# Altium PCB uku20710_proc.PcbDoc (part 2 of 3)
Units mm, origin at the board's own origin, x right, y up, seen from the top; angles counter-clockwise.
Board outline 354.7 x 156.7 mm, 4 copper layers (Top Layer, MidLayer1, MidLayer2, Bottom Layer); 286 components, 533 nets, 991 pads, 570 vias.
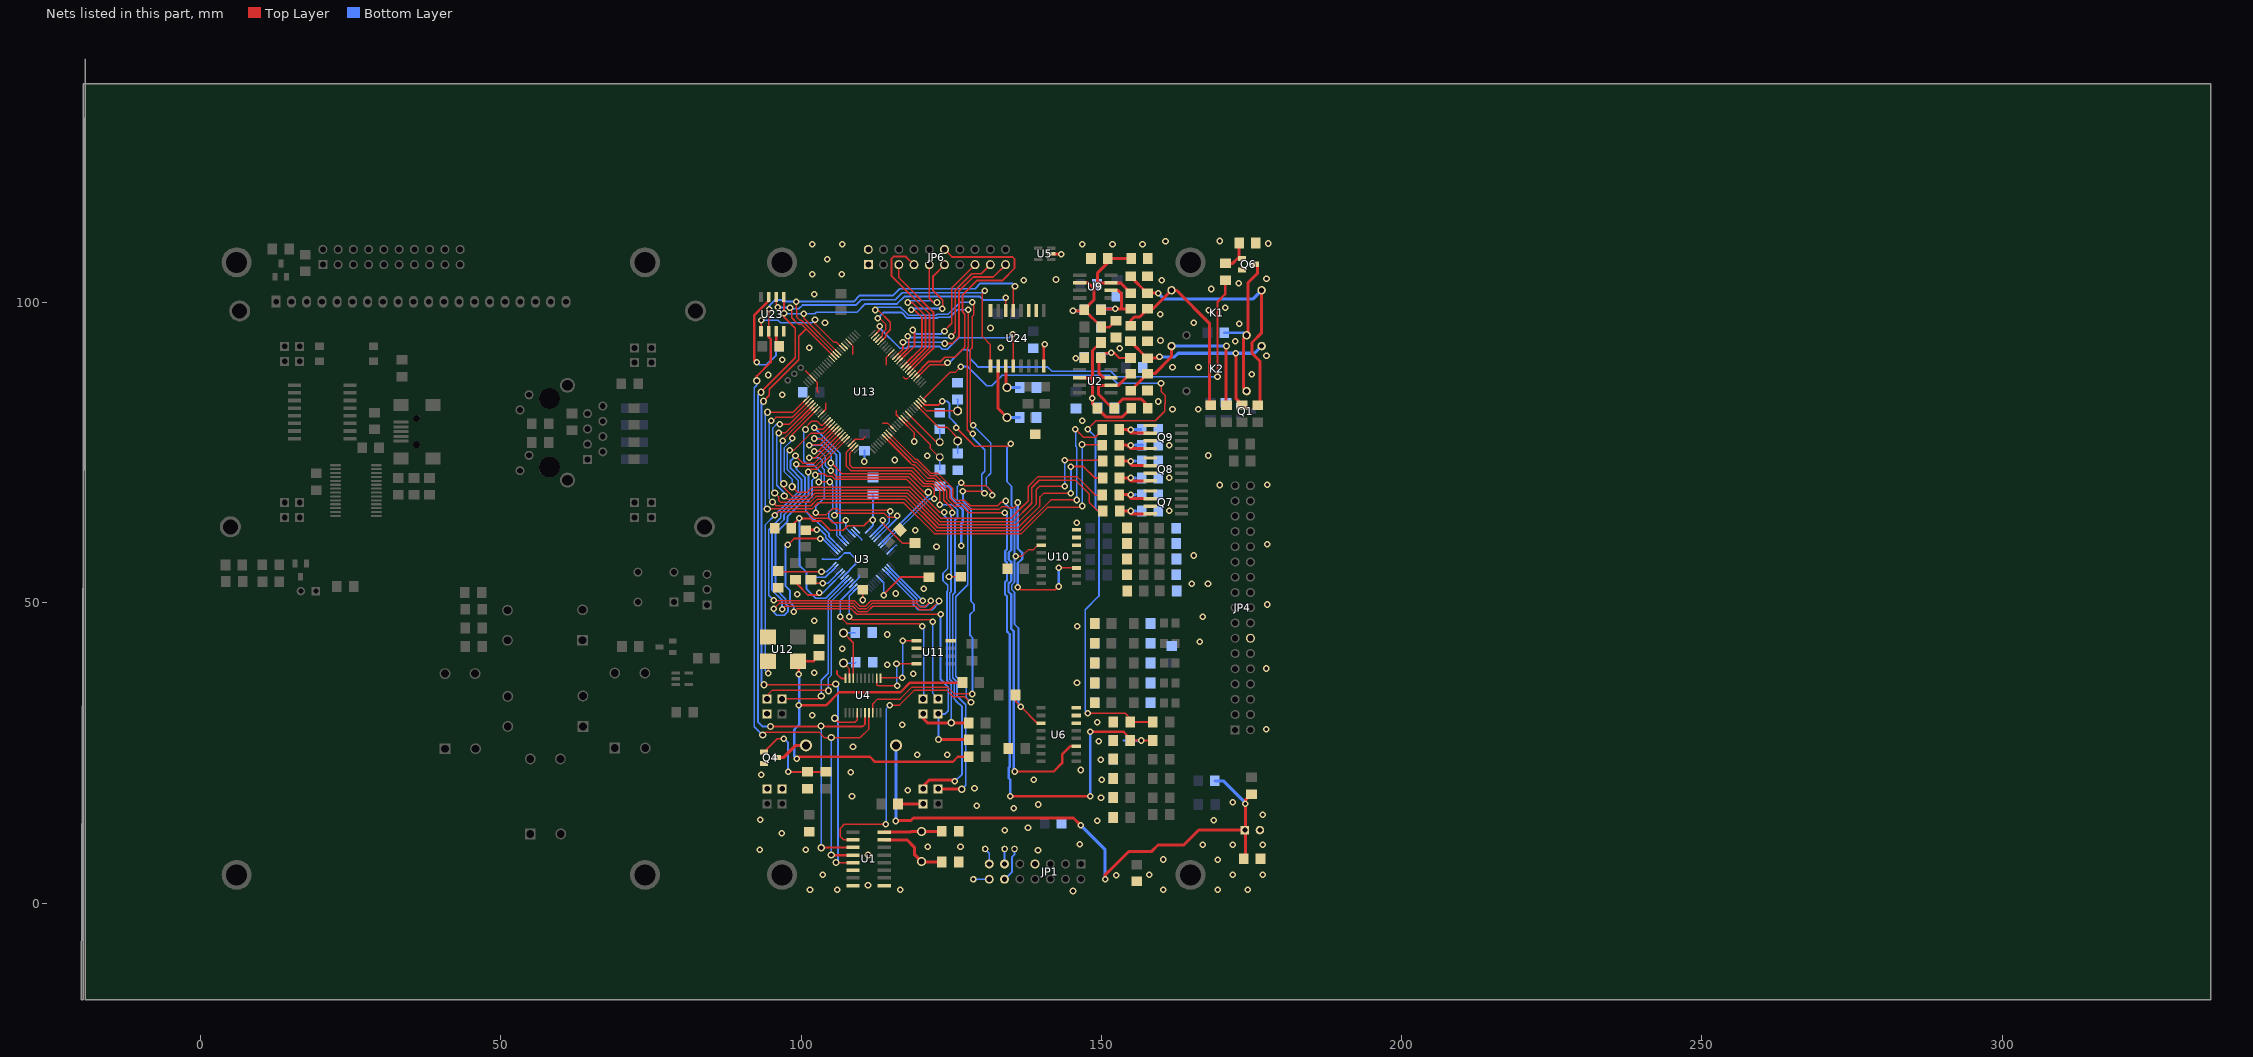
[diagram p2: the nets of this part, all layers, seen from the top]

## Via types
v1: diameter 1.1, hole 0.6, Top Layer to Bottom Layer, 491 vias
v2: diameter 1.2, hole 0.7, Top Layer to Bottom Layer, 63 vias
v3: diameter 1.5, hole 1, Top Layer to Bottom Layer, 12 vias
v4: diameter 1.27, hole 0.7, Top Layer to Bottom Layer, 3 vias
v5: diameter 1.2, hole 0.6, Top Layer to Bottom Layer, 1 vias

## Nets (pads, with @x,y where several pads share a name; then routed paths per layer and width w, separated by ;. In a path a pad name is that pad's centre, name@x,y a point inside that pad or via, vN(x,y) a via of type N, cw(c..) or ccw(c..) an arc to the next point about the centre after c; other vN are vias at no path point) (continued)
GND: C1.2 C2.1 C3.2 C4.2 C5.2 C6.2 C7.2 C8.2 C9.2 C10.2 C12.1 C13.2 C14.1 C15.1 C16.1 C17.1 C18.1 C19.1 C20.1 C21.2 C22.1 C23.2 C24.2 C25.1 C26.2 C28.2 C30.2 C31.2 C32.2 C33.2 C34.2 C35.1 C36.1 C37.2 C38.2 C39.2 C40.2 C50.1 C51.1 C52.1 C53.1 C54.1 C55.1 C56.1 C57.1 C58.1 C60.1 C62.1 C63.1 C64.1 C65.1 C66.2 C200.1 C201.1 D3.1 D4.1 D6.1 D7.1 D8.1 D9.1 D10.1 D11.1 D12.1 D13.1 JP1.7 JP4.14 JP6.1 JP6.2 Q1.2 Q4.2 Q6.2 Q7.1 Q7.3 Q8.1 Q8.3 Q9.1 Q9.3 R1.1 R18.2 R19.1 R23.1 R24.2 R26.2 R28.2 R32.2 R34.1 R35.2 R39.1 R40.2 R48.1 R55.1 R59.1 R69.1 R70.1 R74.1 R76.1 R77.1 R78.1 R81.1 R82.1 R117.1 R127.1 U1.6 U1.8 U1.9 U3.15 U3.19 U3.35 U3.36 U3.47 U4.10 U5.2 U6.6 U6.7 U6.8 U10.6 U10.7 U10.8 U11.2 U11.8 U12.2 U13.11 U13.15 U13.31 U13.41 U13.55 U13.72 U13.83 U13.97 U23.4 U24.8 U24.10 U24.11 U24.16 X5.1 X9.1 X11.1 | length 62.9
  Top Layer w0.25: 100.724,88.638 U13.72@101.912,87.449 102.649,86.713 102.649,85.251 102.849,85.051 ; U13.83@103.327,81.439 104.099,82.211 104.099,83.251 ; U13.55@107.923,93.46 108.55,92.832 108.55,91.373 ; U13.97@108.276,76.489 109.007,77.219 110.25,77.219 110.624,77.593 110.624,77.62 ; C30.2@110.246,52.149 110.279,52.116 v1@110.279,50.449 ; 113.624,79.92 114.391,79.92 U13.11@115.347,78.964 ; 114.201,89.623 114.201,90.9 U13.41@114.994,91.692 ; 115.824,81.971 115.824,81.316 116.616,80.523 U13.15@116.762,80.378 118.853,78.287 118.853,77.519 ; 117.024,87.573 117.324,87.273 117.646,87.273 U13.31@118.529,88.156
  Top Layer w0.3: 105.972,38.66 105.972,38.11 106.671,37.41 U4.10@107.377,37.41
  Top Layer w0.4: C30.2@110.227,51.548 110.246,51.566 C30.2@110.246,52.149 ; 140.308,92.523 140.358,92.523 140.419,92.462 U24.8@140.419,89.426 U24.8@140.419,89.373
  Top Layer w0.5: U24.10@139.149,98.676 U24.10@139.174,98.701 ; U5.2@141.399,108.101 U5.2@141.633,108.101 v1@142.824,108.101
  Bottom Layer w0.25: 103.628,57.216 106.193,57.216 ; U3.19@107.085,54.448 U3.19@107.142,54.506 ; U3.15@108.499,53.034 109.677,54.213 109.677,54.549 ; U3.35@108.852,61.767 110.102,60.518 110.102,60.451 ; U3.47@114.757,58.585 115.772,59.6 115.879,59.6
  Bottom Layer w0.3: 103.576,57.286 103.612,57.25 ; 106.176,57.25 107.213,58.286 108.115,58.286 109.027,57.375 109.027,56.391 U3.19@107.142,54.506 ; v1@110.557,73.575 C32.2@110.557,75.332
  Bottom Layer w0.4: C35.1@123.118,69.389 124.7,69.389 124.971,69.117 124.971,67.427 126.882,65.517 126.882,63.416 126.682,63.216 v1(126.682,59.465)
  other v1: 145.271,2.001 101.472,2.201 106.027,2.201 116.529,2.201 160.29,2.201 169.371,2.201 174.344,2.201 111.128,2.951 152.438,4.651 103.572,4.701 157.971,4.701 171.843,4.701 176.845,4.701 169.343,7.202 160.271,7.252 111.128,8.002 139.435,8.802 93.123,8.902 100.775,8.902 121.071,9.402 126.532,9.402 166.842,9.702 171.843,9.702 176.871,9.702 146.371,9.802 96.774,11.651 133.871,12.103 137.771,12.503 149.338,13.703 168.692,13.751 93.173,13.851 176.845,14.704 135.434,15.751 129.271,16.204 139.471,16.404 171.843,16.804 149.938,17.504 108.472,17.804 117.771,18.805 128.871,19.105 150.038,20.505 138.735,20.551 93.374,21.351 108.272,21.755 146.587,22.151 149.888,23.851 119.33,24.706 124.331,24.706 108.627,26.051 149.588,26.951 177.471,28.957 116.829,29.707 149.338,30.108 101.826,31.251 145.937,36.651 118.68,38.21 102.172,38.36 177.445,39.051 114.329,39.71 106.827,42.351 166.392,43.511 114.329,44.711 145.971,46.112 102.172,47.012 166.842,47.662 177.595,49.713 110.252,50.464 99.325,51.451 115.729,51.551 120.43,52.313 165.042,53.151 167.742,53.151 165.392,57.865 122.531,59.315 177.595,59.715 118.98,62.051 145.887,63.316 161.271,65.316 169.693,69.618 177.595,69.651 161.271,70.818 110.502,73.52 115.571,73.769 120.971,74.469 167.771,74.519 161.271,76.219 118.83,76.851 146.837,80.32 161.841,82.221 166.142,82.221 159.49,83.521 96.824,84.651 94.524,87.922 175.044,88.051 161.841,89.222 166.171,89.222 96.824,90.451 145.737,90.751 177.495,91.151 153.039,92.373 101.326,92.451 133.234,92.451 140.585,93.051 172.293,93.524 159.84,93.674 131.533,95.751 172.944,96.451 103.972,96.624 165.371,96.624 159.771,98.075 167.842,98.725 170.643,99.125 102.172,101.376 168.292,102.251 172.844,103.176 137.035,103.676 160.071,103.726 142.436,103.826 177.495,103.976 101.876,104.726 106.772,104.726 104.326,107.227 143.336,108.051 106.827,109.678 146.837,109.678 151.838,109.678 101.826,109.728 156.84,109.728 177.771,109.828 160.671,110.228 169.693,110.251
GND_P: 
NetA1_1: A1.1 Q4.3 | length 5.6
  Top Layer w0.5: Q4.3@96.022,24.205 97.023,24.205 99.025,26.207 A1.1@100.775,26.207
NetA1_2: A1.2 C3.1 R16.1 R19.2 R103.1 | length 99.8
  Top Layer w0.5: v1@115.779,13.753 118.28,13.753 118.68,14.154 145.337,14.154 v1(146.537,12.953) ; v1(150.638,3.951) 150.638,4.701 151.238,5.301 ; 151.25,5.29 154.511,8.551 158.313,8.551 159.414,9.652 163.714,9.652 166.213,12.151 173.886,12.151 C3.1@173.974,12.151 ; R19.2@173.674,7.401 173.974,7.701 173.974,12.143 C3.1@173.974,12.151 ; R16.1@174.981,18.139 173.974,17.132 C3.1@173.974,12.151
  Bottom Layer w0.5: v1@115.779,13.753 115.797,13.772 A1.2@115.797,26.245 ; v1(146.537,12.953) 150.638,8.852 v1(150.638,3.951) ; R103.1@168.905,20.349 170.299,20.349 173.944,16.704 v1(173.944,16.554)
  other v1: 115.779,13.653
NetBT2_1: 
NetBT2_2: 
NetBT700_1: 
NetC2_1: 
NetC2_2: C2.2 U4.8 Y5.2 | length 10.2
  Top Layer w0.25: Y5.2@107.051,44.969 108.677,43.343 U4.8@108.677,37.41
  Bottom Layer w0.25: Y5.2@107.051,44.969 108.958,44.969 C2.2@109.001,45.012
NetC11_1: C11.1 C15.2 R57.2 R62.1 U9.6 | length 16.8
  Top Layer w0.4: R62.1@149.987,95.908 150.018,95.908 150.031,95.908 151.345,95.908 C15.2@152.362,96.925
  Top Layer w0.5: 145.874,98.651 145.874,98.626 145.874,98.601 146.93,98.601 R57.2@147.062,98.733 ; U9.6@146.374,103.301 146.385,103.301 147.774,103.301 148.774,102.301 148.774,100.445 R57.2@147.137,98.808 R57.2@147.062,98.733 ; R62.1@150.124,96.001 150.031,95.908 150.024,95.901 150.018,95.908 150.002,95.923 147.192,98.733 147.137,98.733 R57.2@147.062,98.733 ; R62.1@150.468,95.908 R62.1@150.487,95.908
  Bottom Layer w0.5: 145.874,98.601 147.074,98.601 C11.1@147.174,98.701
  other v1: 145.261,98.626
NetC11_2: C11.2 R57.1 R61.2 U9.2 | length 11
  Top Layer w0.5: R57.1@150.47,98.641 150.78,98.951 v1(152.274,98.951) 153.374,98.951 ; U9.2@151.585,102.019 152.807,102.019 153.374,101.451 153.374,98.951 ; R61.2@154.881,98.939 154.874,98.951 153.374,98.951
  Bottom Layer w0.6: C11.2@150.477,98.648 150.78,98.951 v1(152.274,98.951) v1@152.324,98.951
NetC12_2: C12.2 K1.3 R60.1 R61.1 | length 32
  Top Layer w0.5: R61.1@154.881,96.139 154.881,97.008 155.474,97.601 156.374,97.601 157.699,98.926 157.774,99.001 158.64,99.001 K1.3@161.68,102.041 162.485,102.041 167.968,96.558 R60.1@167.968,82.864
NetC14_2: C14.2 K1.1 R64.1 R65.1 | length 44.4
  Top Layer w0.5: R65.1@154.874,104.351 154.874,104.301 157.574,101.601 157.678,101.601 159.424,101.601 v1(159.474,101.551) ; R64.1@176.374,82.851 176.374,90.251 175.074,91.551 175.074,93.351 176.68,94.957 K1.1@176.68,102.041
  Bottom Layer w0.5: v1(159.474,101.551) 160.474,100.551 175.19,100.551 K1.1@176.68,102.041
NetC21_1: C21.1 C34.1 U3.18 U3.23 U3.37 | length 48.4
  Top Layer w0.3: C21.1@98.376,62.352 C21.1@98.375,62.402 98.376,62.802 v1(99.676,64.103) ; v1@99.702,63.687 99.897,63.882 100.052,64.037 101.487,64.037 101.891,63.632 103.306,63.632 104.852,62.087 107.002,62.087 107.752,62.837 110.452,62.837 111.402,63.787 v1(111.952,63.787)
  Bottom Layer w0.3: v1@99.702,63.687 99.702,56.237 100.902,55.037 100.902,54.237 ; U3.23@105.67,55.863 104.044,54.237 100.902,54.237 ; U3.18@107.438,54.095 104.08,50.737 102.402,50.737 100.902,52.237 100.902,54.237 ; U3.37@111.221,62.12 111.952,62.851 v1(111.952,63.787) 111.952,67.987 C34.1@111.902,68.037
NetC22_1: 
NetC22_2: C22.2 U4.9 Y5.1 | length 5.1
  Top Layer w0.25: Y5.1@107.051,39.969 108.027,38.993 U4.9@108.027,37.41
  Bottom Layer w0.25: Y5.1@107.051,39.969 108.979,39.969 C22.2@109.114,40.105
NetC23_1: C23.1 R65.2 R69.2 U9.3 | length 14.7
  Top Layer w0.5: R65.2@154.874,101.551 154.874,101.601 153.187,103.289 U9.3@151.585,103.289 149.587,103.289 149.374,103.501 149.374,104.951 151.059,106.636 C23.1@151.059,107.325 151.083,107.301 154.874,107.301 R69.2@154.937,107.308
NetC33_1: C33.1 R98.1 R99.1 U12.4 | length 78.8
  Top Layer w0.4: v1(99.275,24.006) 99.619,24.35 111.435,24.35 112.278,23.506 125.238,23.506 126.082,24.35 R99.1@127.92,24.35 ; v1(99.625,32.908) 104.126,32.908 106.327,35.109 116.529,35.109 118.123,36.703 R98.1@126.87,36.703 ; v1(99.625,38.11) 99.625,40.26 102.076,40.26 C33.1@102.976,41.16
  Bottom Layer w0.4: v1(99.275,24.006) 98.825,24.456 98.825,28.857 99.675,29.707 99.675,38.06 v1(99.625,38.11)
NetC35_2: C35.2 U13.16 Y1.2 | length 11.1
  Top Layer w0.25: U13.16@117.115,80.732 121.524,76.322 121.524,75.701 122.976,74.25 123.074,74.25 Y1.2@123.079,74.25
  Bottom Layer w0.3: Y1.2@123.079,74.25 123.079,74.248 123.079,72.228 C35.2@123.118,72.189 C35.2@123.124,72.195
NetC36_2: C36.2 U13.18 Y1.1 | length 9.3
  Top Layer w0.25: U13.18@117.822,81.439 122.511,76.75 123.074,76.75 Y1.1@123.079,76.75
  Bottom Layer w0.3: Y1.1@123.079,76.75 123.079,78.862 C36.2@123.081,78.864
NetC45_1: 
NetC45_2: 
NetC46_1: 
NetC46_2: 
NetC47_2: 
NetC48_1: 
NetC48_2: 
NetC49_1: 
NetC50_2: C50.2 U24.2 Y4.1 | length 11.3
  Top Layer w0.5: U24.2@132.799,89.426 132.799,82.334 Y4.1@134.274,80.859
  Bottom Layer w0.5: Y4.1@134.274,80.859 136.367,80.859 C50.2@136.387,80.845
NetC51_2: C51.2 U13.23 Y3.1 | length 8.9
  Top Layer w0.25: U13.23@119.59,83.207 120.853,81.943 Y3.1@126.075,81.943
  Bottom Layer w0.3: C51.2@126.021,83.848 126.075,83.795 Y3.1@126.075,81.943
NetC52_2: C52.2 U13.22 Y3.2 | length 11.6
  Top Layer w0.25: U13.22@119.236,82.853 122.838,79.251 124.274,79.251 126.075,77.451 Y3.2@126.075,76.943
  Bottom Layer w0.3: C52.2@126.075,74.901 Y3.2@126.075,76.943
NetC53_2: C53.2 U24.3 Y4.2 | length 5.8
  Top Layer w0.5: U24.3@134.069,89.426 134.069,86.064 Y4.2@134.274,85.859
  Bottom Layer w0.5: Y4.2@134.274,85.859 136.372,85.859 C53.2@136.387,85.845
NetC61_1: C61.1 C64.2 R12.2 R122.1 U2.6 | length 22.8
  Top Layer w0.5: U2.6@146.374,87.451 148.474,87.451 ; C61.1@149.224,82.451 148.474,83.201 v1(148.474,84.051) 148.474,87.451 ; C61.1@149.324,82.401 150.824,80.901 153.43,80.901 R12.2@154.937,82.408 ; R122.1@149.874,93.351 148.524,92.001 148.524,89.651 148.474,89.601 148.474,87.451
  Bottom Layer w0.5: v1(148.474,84.051) 148.474,83.201 149.224,82.451 149.372,82.451 C64.2@149.374,82.451
NetC61_2: C61.2 R12.1 R121.2 U2.2 | length 18.3
  Top Layer w0.5: R121.2@154.881,88.139 154.762,88.139 152.839,86.216 U2.2@151.574,86.216 149.739,86.216 149.474,85.951 149.474,84.751 151.774,82.451 152.024,82.451 152.074,82.401 152.074,82.404 152.074,82.451 152.077,82.454 153.524,83.901 156.674,83.901 157.674,82.901 157.674,82.408 R12.1@157.674,82.401
NetC62_2: C62.2 K2.3 R13.1 R121.1 | length 30
  Top Layer w0.5: R121.1@154.881,85.339 154.874,85.401 154.881,85.401 154.924,85.401 157.674,88.151 158.874,88.151 161.68,90.957 K2.3@161.68,92.741 ; R13.1@170.768,82.864 170.768,92.695 v1(170.824,92.751)
  Bottom Layer w0.5: K2.3@161.68,92.741 170.814,92.741 v1(170.824,92.751)
NetC63_2: C63.2 K2.1 R124.1 R125.1 | length 33
  Top Layer w0.5: R125.1@154.868,93.564 154.874,93.551 154.874,93.451 157.574,90.751 157.678,90.751 159.474,90.751 v1(159.674,90.951) ; v1(172.374,91.551) 172.374,84.057 R124.1@173.568,82.864
  Bottom Layer w0.5: v1(159.674,90.951) 162.174,90.951 162.774,91.551 v1(172.374,91.551) 175.49,91.551 K2.1@176.68,92.741
NetC66_1: C66.1 R125.2 R127.2 U2.3 | length 12.8
  Top Layer w0.4: R127.2@149.912,90.795 150.642,91.524 151.662,91.524 152.212,91.524 152.973,90.764 R125.2@154.868,90.764
  Top Layer w0.5: R127.2@150.474,90.851 150.474,90.801 150.19,90.517 149.574,89.901 149.574,88.201 150.289,87.486 U2.3@151.574,87.486
  Bottom Layer w0.5: C66.1@149.972,90.854 150.641,91.524 v1@151.612,91.524
  other v1: 151.662,91.624
NetC200_2: C200.2 U1.16 Y2.2 | length 9.7
  Top Layer w0.5: U1.16@113.803,11.804 118.154,11.804 118.26,11.911 Y2.2@120.054,11.911 123.368,11.911 C200.2@123.418,11.961
NetC201_2: C201.2 U1.15 Y2.1 | length 11.8
  Top Layer w0.5: U1.15@113.852,10.528 117.629,10.528 118.854,9.303 118.854,8.111 120.162,6.803 C201.2@123.405,6.803
NetC302_1: 
NetC302_2: 
NetC500_2: 
NetC502_1: 
NetC502_2: 
NetC505_1: 
NetC505_2: 
NetC508_1: 
NetC510_1: 
NetC511_1: 
NetC511_2: 
NetC512_2: 
NetC513_2: 
NetC514_1: 
NetC516_1: 
NetC516_2: 
NetC517_1: 
NetC600_1: 
NetC600_2: 
NetC700_1: 
NetC700_2: 
NetC701_1: 
NetC702_1: 
NetC704_2: 
NetC705_2: 
NetC706_1: 
NetC707_1: 
NetC707_2: 
NetC709_1: 
NetC709_2: 
NetC710_1: 
NetC713_1: 
NetC714_1: 
NetC715_1: 
NetD1_2: D1.2 X18.1 | length 4.3
  Top Layer w0.5: D1.2@116.079,16.554 116.092,16.554 116.145,16.501 X18.1@120.322,16.501
NetD3_1: 
NetD3_2: 
NetD5_1: D5.1 K1.5 K2.5 Q6.3 | length 26.3
  Top Layer w0.5: K2.5@174.18,85.241 173.674,85.746 173.674,94.035 K1.5@174.18,94.541 174.374,94.735 174.374,103.251 176.024,104.901 176.024,106.122 Q6.3@175.768,106.378
  Bottom Layer w0.4: D5.1@170.474,94.951 173.77,94.951 K1.5@174.18,94.541
NetD20_2: 
NetD500_1: 
NetD500_2: 
NetD501_1: 
NetD503_1: 
NetD505_1: 
NetD505_2: 
NetD506_1: 
NetD700_1: 
NetD701_1: 
NetD702_1: 
NetD703_2: 
NetD704_1: 
NetD705_1: 
NetD706_1: 
NetDS1_1: 
NetDS1_2: 
NetFU500_1: 
NetFU700_1: 
NetFU700_2: 
NetJ1_2: 
NetJ1_3: 
NetJ1_4: 
NetJ1_7: 
NetJ301_1: 
NetJ301_2: 
NetJ301_3: 
NetJ301_6: 
NetJ301_10: 
NetJ301_11: 
NetJ600_1: 
NetJP1_9: 
NetJP1_10: 
NetJP2_1: 
NetJP2_2: 
NetJP3_3: 
NetJP3_3: 
NetJP5_5: 
NetJP5_6: 
NetJP5_7: 
NetJP5_9: 
NetJP5_10: 
NetJP5_11: 
NetJP5_12: 
NetJP9_1: 
NetJP10_1: 
NetJP10_2: 
NetJP10_3: 
NetJP10_4: 
NetJP10_5: 
NetJP10_6: 
NetQ1_1: Q1.1 R1.2 R84.2 | length 5
  Bottom Layer w0.3: R84.2@168.113,80.469 172.365,80.469 Q1.1@172.868,80.971
NetQ1_1: 
NetQ1_2: 
NetQ4_1: Q4.1 R22.2 R23.2 | length 16.4
  Top Layer w0.3: Q4.1@93.774,25.106 96.024,27.357 v1(97.124,27.357) ; v1(97.825,21.856) 97.825,21.805 97.862,21.843 R22.2@104.133,21.843
  Bottom Layer w0.3: v1(97.124,27.357) 97.825,26.657 v1(97.825,21.856)
NetQ5_2: 
NetQ6_1: Q6.1 R72.2 R74.2 | length 5.4
  Top Layer w0.5: R72.2@170.667,106.528 171.867,106.528 172.666,107.326 Q6.1@173.422,107.326 ; Q6.1@172.924,107.585 172.924,109.885 R74.2@172.924,109.929
NetQ7_2: Q7.2 R31.2 R34.2 | length 6.2
  Top Layer w0.5: R31.2@153.012,67.995 153.019,68.001 154.324,68.001 154.499,67.826 154.549,67.776 154.599,67.726 154.984,67.341 Q7.2@158.136,67.341
  Bottom Layer w0.5: v1@154.874,67.951 155.624,67.951 155.637,67.995
  other v1: 154.874,68.001
NetQ7_4: Q7.4 R38.2 R39.2 | length 6.1
  Top Layer w0.5: R38.2@153.024,65.301 154.324,65.301 154.513,65.112 154.563,65.062 154.613,65.012 154.824,64.801 154.874,64.801 Q7.4@158.136,64.801
  Bottom Layer w0.5: v1(154.874,65.273) 155.547,65.273 155.574,65.301 155.637,65.295
NetQ8_2: Q8.2 R30.2 R77.2 | length 6.2
  Top Layer w0.5: R30.2@153.012,73.595 154.318,73.595 154.324,73.601 154.503,73.423 154.603,73.323 155.089,72.836 Q8.2@158.124,72.836
  Bottom Layer w0.5: v1(154.874,73.595) 155.637,73.595
NetQ8_4: Q8.4 R37.2 R78.2 | length 6.1
  Top Layer w0.5: R37.2@153.012,70.795 154.324,70.795 154.499,70.62 154.549,70.57 154.599,70.52 154.823,70.296 154.874,70.296 Q8.4@158.124,70.296
  Bottom Layer w0.5: v1(154.874,70.795) 155.637,70.795
NetQ9_2: Q9.2 R79.2 R81.2 | length 7.2
  Top Layer w0.5: R79.2@152.962,78.845 154.274,78.845 ; 154.274,78.801 154.274,78.845 ; Q9.2@158.124,78.236 154.939,78.236 154.624,78.551 154.574,78.601 154.524,78.651 154.331,78.845 154.274,78.845
  Bottom Layer w0.5: v1@154.874,78.845 R81.2@156.587,78.845
  other v1: 154.874,78.801
NetQ9_4: Q9.4 R80.2 R82.2 | length 6.7
  Top Layer w0.5: R80.2@152.962,76.245 154.268,76.245 154.274,76.251 154.474,76.051 154.524,76.001 154.574,75.951 154.829,75.696 154.874,75.696 Q9.4@158.124,75.696
  Bottom Layer w0.5: 155.587,76.245 R82.2@156.687,76.245 R82.2@156.874,76.245
  other v1: 154.874,76.251
NetQ10_1: 
NetQ10_3: 
NetQ10_3: 
NetQ11_1: 
NetQ11_1: 
NetQ11_3: 
NetQ500_1: 
NetQ501_1: 
NetQ600_1: 
NetQ600_3: 
NetQ700_1: 
NetQ700_3: 
NetR3_1: 
NetR3_2: 
NetR3_2: 
NetR3_2: 
NetR3_2: 
NetR3_2: 
NetR3_2: 
NetR3_2: 
NetR4_1: 
NetR4_2: 
NetR5_1: 
NetR5_2: 
NetR6_1: 
NetR6_2: 
NetR7_1: 
NetR7_2: 
NetR7_2: 
NetR8_1: 
NetR8_1: 
NetR8_2: 
NetR8_2: 
NetR20_1: R20.1 U3.7 | length 12.1
  Top Layer w0.3: v1(113.728,51.248) 113.728,51.413 114.677,52.362 115.052,52.737 116.59,54.274 R20.1@121.309,54.274
  Bottom Layer w0.3: U3.7@112.989,54.095 113.737,53.346 113.737,51.407 113.728,51.398 v1(113.728,51.248)
NetR22_2: 
NetR22_2: 
NetR22_2: 
NetR22_2: 
NetR22_2: 
NetR22_2: 
NetR22_2: 
NetR22_2: 
NetR22_2: 
NetR25_1: 
NetR30_2: 
NetR38_1: 
NetR43_1: 
NetR43_2: 
NetR43_2: 
NetR44_2: 
NetR44_2: 
NetR45_2: 
NetR52_1: 
NetR53_1: 
NetR57_1: 
NetR60_1: 
NetR69_2: 
NetR83_1: 
NetR90_2: 
NetR91_1: 
NetR93_1: 
NetR95_1: R95.1 U23.3 | length 2.4
  Top Layer w0.4: R95.1@95.824,92.851 95.859,92.886 U23.3@95.859,95.201
NetR96_2: R96.2 U23.7 | length 17.7
  Top Layer w0.4: v1(92.574,90.051) 92.174,90.451 92.174,97.851 94.589,100.266 U23.7@94.589,100.901
  Bottom Layer w0.3: v1(92.574,90.051) 93.002,89.624 94.197,89.624 95.824,91.251 95.824,92.708 R96.2@95.824,92.801
NetR112_1: R112.1 U3.26 X8.1 | length 74.1
  Top Layer w0.25: v1(98.776,48.499) 99.241,48.963 108.401,48.963 109.264,48.101 v1(123.224,48.101)
  Top Layer w0.3: v1(97.776,59.651) 98.811,60.687 v1(103.152,60.687)
  Top Layer w0.5: v2@122.812,27.201 R112.1@127.894,27.201 ; v2@122.855,27.201 v2(122.855,27.208)
  Bottom Layer w0.3: v1@97.376,59.651 97.376,52.8 98.126,52.05 98.126,50.099 98.776,49.449 v1(98.776,48.499) ; v1(103.152,60.687) 103.569,60.687 U3.26@105.67,58.585 ; X8.1@122.805,31.559 122.855,31.559 v2(122.855,27.208) ; X8.1@122.822,31.501 123.997,31.501 124.505,32.009 124.505,35.96 123.224,37.241 v1(123.224,48.101) v1@123.324,48.001
NetR113_1: R113.1 U3.28 X7.1 | length 84
  Top Layer w0.25: v1@102.5,71.069 102.9,71.469 103.85,71.469 104.25,71.069 105.15,71.069 105.668,70.551 117.574,70.551 123.074,65.051 v1(123.824,65.051)
  Top Layer w0.5: X7.1@120.322,31.501 120.322,30.741 121.054,30.009 R113.1@127.856,30.009
  Bottom Layer w0.3: v1@102.5,71.069 101.8,70.369 101.8,67.618 100.749,66.568 100.749,65.217 102.13,63.837 102.302,63.837 104.652,61.487 104.652,61.017 104.96,60.71 U3.28@106.378,59.292 ; v1(123.824,65.051) 123.824,64.501 124.424,63.901 124.424,55.701 123.624,54.901 123.624,53.701 124.424,52.901 124.424,51.985 124.272,51.832 124.272,43.985 124.272,37.094 124.424,36.941 125.005,36.36 v2(125.005,30.009)
  other v1: 102.35,71.269
NetR114_1: R114.1 U3.27 | length 6
  Top Layer w0.5: R114.1@101.652,62.187 101.702,62.137 102.552,62.137 v1(102.602,62.187)
  Bottom Layer w0.3: v1(102.602,62.187) 103.152,62.187 104.102,61.237 104.102,60.86 U3.27@106.024,58.938
NetR115_1: R115.1 U3.21 | length 5.7
  Top Layer w0.3: R115.1@101.659,53.824 102.233,53.25 v1(103.577,53.25)
  Bottom Layer w0.25: v1(103.577,53.25) 104.472,53.25 U3.21@106.378,55.155
NetR116_1: R116.1 U3.20 | length 12.7
  Top Layer w0.25: R116.1@99.059,53.824 99.059,53.48 100.252,52.287
  Top Layer w0.3: R116.1@99.059,53.824 99.059,53.48 99.059,53.367 101.126,51.299 103.027,51.299 103.227,51.299 v1@103.327,51.399
  Bottom Layer w0.25: v1(103.027,51.699) 103.677,51.699 104.666,52.688 104.666,52.737 U3.20@106.731,54.802
NetR117_2: R117.2 U3.24 | length 9.6
  Top Layer w0.25: R117.2@96.196,55.149 v1(103.39,55.149) v1@103.402,55.137
  Bottom Layer w0.25: v1(103.39,55.149) 104.25,55.149 U3.24@105.317,56.216
NetR120_1: R120.1 U3.39 | length 10.6
  Top Layer w0.25: v1@113.702,63.887 113.702,63.087 116.84,59.949 R120.1@118.946,59.949
  Bottom Layer w0.3: U3.39@111.928,61.413 113.702,63.187 v1@113.702,63.887
  other v1: 113.603,63.767
NetR305_2: 
NetR306_2: 
NetR504_1: 
NetR505_2: 
NetR505_2: 
NetR510_1: 
NetR600_1: 
NetR600_2: 
NetR603_1: 
NetR603_2: 
NetR605_2: 
NetR702_2: 
NetR704_2: 
NetR705_1: 
NetS2_1: 
NetU1_1: 
NetU1_4: 
NetU1_5: 
NetU3_13: U3.13 X4.1 | length 32.7
  Top Layer w0.25: v1(108.001,47.663) 108.501,47.163 121.605,47.163 v1(121.905,46.863)
  Bottom Layer w0.25: v1(108.001,47.663) 108.001,51.122 U3.13@109.206,52.327 ; v1(121.905,46.863) 121.874,46.833 121.874,34.99 X4.1@122.855,34.01
NetU3_14: U3.14 X3.1 | length 32.6
  Top Layer w0.25: v1(106.501,47.663) 107.617,46.547 119.72,46.547 v1(120.154,46.113)
  Bottom Layer w0.25: v1(106.501,47.663) 106.501,50.329 U3.14@108.852,52.681 ; v1(120.154,46.113) 120.424,45.843 120.424,34.08 X3.1@120.304,33.96
NetU3_16: U3.16 X1.1 | length 30.7
  Top Layer w0.25: X1.1@94.322,34.001 94.322,34.534 95.248,35.46 104.45,35.46 v2(104.55,35.36)
  Bottom Layer w0.25: v2(104.55,35.36) 104.55,37.46 105.05,37.961 105.05,50.293 U3.16@108.145,53.388
NetU3_17: U3.17 X2.1 | length 27.9
  Top Layer w0.25: X2.1@96.822,34.001 102.891,34.001 v2(103.35,34.46)
  Bottom Layer w0.25: v2(103.35,34.46) 103.35,37.11 104.5,38.261 104.5,50.45 U3.17@107.792,53.741 ; U3.17@107.752,53.737 U3.17@107.787,53.737
NetU4_1: U4.1 U11.1 | length 12.1
  Top Layer w0.25: U4.1@113.227,37.41 113.328,37.511 v1(116.853,37.511) ; v1(116.903,43.662) 116.908,43.667 U11.1@119.205,43.667
  Bottom Layer w0.25: v1(116.853,37.511) 116.903,37.561 v1(116.903,43.662)
NetU4_2: U4.2 U11.4 | length 11.6
  Top Layer w0.25: U4.2@112.577,37.41 112.577,36.361 112.778,36.159 v1(115.979,36.159) ; v1@115.879,39.857 U11.4@119.205,39.857
  Bottom Layer w0.25: v1(115.879,39.86) 115.879,36.259 v1(115.979,36.159)
NetU5_1: 
NetU8_3: 
NetU8_7: 
NetU8_8: 
NetU11_5: 
NetU14_3: 
NetU14_4: 
NetU14_5: 
NetU14_6: 
NetU14_12: 
NetU14_13: 
NetU14_14: 
NetU15_3: 
NetU15_3: 
NetU15_3: 
NetU15_3: 
NetU15_4: 
NetU15_5: 
NetU15_5: 
NetU15_5: 
NetU15_5: 
NetU15_5: 
NetU15_5: 
NetU15_7: 
NetU15_7: 
NetU15_9: 
NetU15_10: 
NetU15_15: 
NetU16_3: 
NetU16_4: 
NetU16_6: 
NetU19_4: 
NetU21_1: 
NetU21_2: 
NetU503_4: 
NetU600_3: 
NetU700_4: 
NetX13_1: 
NetX15_1: 
NetX16_1: X16.1 X22.1 | length 2.5
  Bottom Layer w0.3: X16.1@133.861,6.501 133.861,8.992 X22.1@133.871,9.002
NetX21_1: X21.1 X23.1 | length 5.8
  Bottom Layer w0.3: X21.1@133.834,3.901 135.134,5.201 135.134,7.702 135.534,8.102 X23.1@135.534,9.002
NetX23_1: 
NetX24_1: X24.1 X26.1 | length 2.8
  Bottom Layer w0.3: X24.1@130.633,9.002 131.321,8.314 X26.1@131.321,6.501
NetX25_1: X25.1 X27.1 | length 2.6
  Bottom Layer w0.3: X25.1@128.682,3.951 128.693,3.961 X27.1@131.321,3.961
NetX32_1: 
NetX33_1: 
OFF1: 
OFF2: 
P0_0: U1.2 U13.46 | length 152.8
  Top Layer w0.25: U1.2@108.677,10.503 107.077,10.503 106.527,11.053 106.527,12.453 107.177,13.103 v1(114.079,13.103) ; v1@112.324,98.601 112.274,98.651 112.274,98.701 112.324,98.651 112.874,98.651 114.824,96.701 114.824,95.451 114.074,94.701 114.074,94.308 U13.46@113.226,93.46 ; v1(114.779,32.958) 116.379,32.958 118.88,35.459 124.181,35.459 125.332,34.309 127.232,34.309 v1@128.182,33.358 ; v1(126.682,70.018) 127.232,69.468 130.783,69.468 131.833,68.417 v1(131.833,67.917) ; v1(128.474,100.051) 128.774,99.751 128.774,97.951 128.474,97.651 128.474,92.451 128.174,92.151 128.174,80.001 v1(128.624,79.551)
  Bottom Layer w0.25: v1(114.079,13.103) 114.129,13.153 114.129,32.308 v1(114.779,32.958) ; v1(126.682,70.018) 126.032,69.367 126.032,67.167 127.732,65.466 127.732,53.013 125.732,51.013 125.732,37.76 127.532,35.959 127.532,34.209 128.182,33.558 v1@128.182,33.358 ; v1@128.474,100.001 v1(128.474,100.051) ; v1(128.624,79.551) 131.574,76.601 131.574,71.551 130.783,70.76 130.783,69.518 131.833,68.467 v1(131.833,67.917)
  Bottom Layer w0.3: v1(112.324,98.751) 112.774,99.201 116.474,99.201 116.844,98.831 116.923,98.831 117.873,97.881 122.476,97.881 122.626,98.031 124.454,98.031 126.474,100.051 v1(128.474,100.051)
  other v1: 128.282,33.408
P0_1: U4.18 U13.47 | length 112.3
  Top Layer w0.25: U4.18@111.927,31.71 111.928,31.711 111.928,33.158 112.728,33.959 116.479,33.959 118.48,35.959 124.381,35.959 125.532,34.809 v1(128.482,34.809) ; v1(112.724,97.351) 112.874,97.501 112.974,97.501 114.124,96.351 114.124,95.551 113.524,94.951 113.524,94.465 U13.47@112.873,93.813 ; v1(126.932,68.567) 130.233,68.567 v1(130.533,68.267) ; v1(127.824,98.801) 127.824,92.601 127.71,92.487 127.71,92.385 127.674,92.35 127.674,78.801 128.324,78.151 v1@128.624,78.151
  Bottom Layer w0.3: v1(112.724,97.351) 113.724,98.351 116.724,98.351 117.674,97.401 122.674,97.401 122.824,97.551 124.774,97.551 126.024,98.801 v1(127.824,98.801) ; 125.174,97.951 125.224,97.951 ; v1(126.932,68.567) 126.932,66.967 128.282,65.617 128.282,50.263 128.782,49.763 128.782,48.712 128.132,48.062 128.132,44.561 128.532,44.161 128.532,34.859 v1(128.482,34.809) ; v1(128.574,78.151) 128.574,77.477 130.583,75.469 130.583,71.868 130.083,71.368 130.083,68.717 v1(130.533,68.267)
P0_2: 
P0_2: 
P0_2: 
P0_2: 
P0_2: U13.98 X19.1 | length 78.7
  Top Layer w0.25: U13.98@108.63,76.136 107.501,75.007 107.501,72.769 108.301,71.969 118.354,71.969 120.504,69.819 121.897,69.819 123.105,68.61 v1(123.105,66.318)
  Top Layer w0.5: X19.1@122.805,19.006 126.706,19.006 v2(126.756,18.956)
  Bottom Layer w0.3: v1(123.105,66.318) 125.18,66.318 126.056,65.443 126.056,64.167 125.606,63.717 125.606,51.713 125.511,51.619 125.232,51.339 125.232,37.509 125.832,36.909 ; 125.823,36.9 125.965,36.758 125.965,34.45 127.406,33.009 127.406,19.606 v2(126.756,18.956)
P0_3: 
P0_3: 
P0_3: 
P0_3: 
P0_3: 
P0_3: 
P0_3: R92.1 U13.99 X17.1 | length 79.7
  Top Layer w0.25: U13.99@108.983,75.782 108.051,74.85 108.051,72.969 108.551,72.469 118.604,72.469 120.805,70.268 122.056,70.268 123.755,68.568 123.755,67.068 125.156,65.668 v1(125.156,64.967) ; v1(124.624,54.351) 124.637,54.339 R92.1@126.562,54.339 R92.1@126.881,54.339
  Top Layer w0.5: X17.1@120.304,19.006 120.322,19.023 120.322,19.473 121.355,20.506 125.331,20.506 v1(125.582,20.255)
  Bottom Layer w0.3: v1(125.156,64.967) 124.974,64.786 124.974,51.856 124.752,51.633 124.752,37.293 125.485,36.559 125.485,33.98 125.806,33.66 ; v1(125.582,20.255) 126.805,21.478 126.805,32.658 125.854,33.608 ; 125.811,33.665 125.861,33.615
P0_4: R31.1 U13.81 | length 75.7
  Top Layer w0.25: v2(98.499,69.319) 99.399,68.418 100.949,68.418 101.75,69.218 118.154,69.218 123.321,64.051 134.894,64.051 136.575,65.733 137.811,66.968 137.811,69.371 139.459,71.019 145.911,71.019 148.985,67.945 R31.1@150.162,67.945 ; v1(98.499,77.371) 98.499,78.025 U13.81@102.619,82.146
  Bottom Layer w0.25: v2(98.499,69.319) 98.499,70.519 97.148,71.869 97.148,75.77 98.499,77.12 v1(98.499,77.371)
P0_5: R38.1 U13.80 | length 79.5
  Top Layer w0.25: v1(96.948,76.97) 96.948,77.171 97.037,77.259 97.037,77.271 98.374,78.608 U13.80@102.266,82.5 ; v2(97.098,69.819) 97.098,69.218 98.599,67.718 101.049,67.718 102.05,68.718 117.904,68.718 123.171,63.451 135.274,63.451 138.409,66.586 138.409,69.168 139.659,70.419 145.661,70.419 148.011,68.068 148.011,66.668 149.378,65.301 R38.1@150.224,65.301
  Bottom Layer w0.25: v1(96.948,76.97) 96.598,76.62 96.598,70.319 v2(97.098,69.819)
P0_6: R30.1 U13.79 | length 82.9
  Top Layer w0.25: v1(96.298,78.271) 97.365,78.271 U13.79@101.912,82.818 ; v2(97.198,67.768) 97.749,67.218 101.249,67.218 102.25,68.218 117.754,68.218 123.001,62.971 135.694,62.971 139.109,66.386 139.109,68.818 139.709,69.419 v1(143.91,69.419) ; v1(143.924,73.701) 150.105,73.701 R30.1@150.212,73.595
  Bottom Layer w0.25: v1(96.298,78.271) 95.948,77.921 95.948,69.569 97.198,68.318 v2(97.198,67.768) ; v1@143.924,69.419 v1(143.924,73.701)
  Bottom Layer w0.3: v1(143.91,69.419) v1@143.91,69.454
P0_7: R37.1 U13.78 | length 85.6
  Top Layer w0.25: v2(95.598,68.268) 96.248,67.618 96.248,67.068 96.598,66.718 101.45,66.718 102.45,67.718 117.504,67.718 122.731,62.491 136.114,62.491 139.759,66.136 139.759,67.618 140.359,68.218 v1(144.91,68.218) ; v1(96.448,79.721) 98.073,79.721 U13.78@101.559,83.207
  Top Layer w0.3: v1(144.91,72.669) 147.011,72.669 148.886,70.795 R37.1@150.212,70.795
  Bottom Layer w0.25: v2(95.598,68.268) 95.298,68.568 95.298,79.121 95.898,79.721 v1(96.448,79.721)
  Bottom Layer w0.3: v1@144.86,68.218 v1(144.91,68.218) v1(144.91,72.669)
P0_8: 
P0_8: 
P0_8: 
P0_8: 
P0_8: 
P0_8: 
P0_8: 
P0_8: 
P0_8: 
P0_8: 
P0_8: 
P0_8: 
P0_8: R79.1 U13.77 | length 94.6
  Top Layer w0.25: v1(94.998,80.321) 95.248,80.321 95.798,80.871 98.517,80.871 U13.77@101.205,83.56 ; v2(95.248,66.768) 95.848,66.168 101.6,66.168 102.65,67.218 117.304,67.218 122.51,62.011 136.477,62.011 141.584,67.118 v1(145.911,67.118) ; v1(145.674,78.901) 147.005,77.571 148.962,77.571 150.162,78.771 R79.1@150.162,78.845 ; R79.1@150.162,78.851 R79.1@150.174,78.851
  Bottom Layer w0.25: v1(94.998,80.321) 94.648,79.971 94.648,67.368 v2(95.248,66.768) ; v1(145.674,78.901) 145.724,78.851 145.724,76.051 145.924,75.851 v1@145.924,67.118
P0_8_: 
P0_8_: 
P0_8_: 
P0_9: R80.1 U13.76 | length 94.2
  Top Layer w0.25: v2(94.348,65.618) 101.8,65.618 102.85,66.668 117.053,66.668 122.19,61.531 136.676,61.531 141.012,65.868 146.561,65.868 v1(146.811,66.118) ; v2(94.398,81.722) 98.66,81.722 U13.76@100.852,83.914 ; v1(146.774,76.351) R80.1@150.055,76.351
  Bottom Layer w0.25: v2(94.348,65.618) 94.048,65.918 94.048,81.372 v2(94.398,81.722) ; v1(146.774,76.351) 146.824,76.301 v1@146.824,66.118
P0_9_: 
P0_9_: 
P0_9_: 
P0_9_: 
P0_10: U13.48
P0_11: U13.49 U24.4 | length 32.5
  Top Layer w0.25: U13.49@112.165,94.52 113.102,95.457 v1(113.102,96.025) ; v1(135.258,94.725) 135.324,94.725 135.339,94.709 U24.4@135.339,89.426
  Bottom Layer w0.3: v1(113.102,96.025) 113.102,95.725 116.453,92.374 117.504,92.374 117.804,92.674 123.055,92.674 123.505,92.224 124.355,92.224 126.256,94.125 134.658,94.125 v1(135.258,94.725)
P0_13: 
P0_15: U1.5 U4.14 U13.62 U23.6 U24.1 | length 175.9
  Top Layer w0.25: U23.6@95.859,100.901 95.859,99.691 96.248,99.302 v1@96.248,98.951 ; v1(98.149,99.151) 98.424,98.876 98.424,97.471 99.544,96.351 100.082,96.351 U13.62@105.448,90.985 ; v1(130.557,101.927) 130.174,101.544 130.174,94.324 131.529,92.969 U24.1@131.529,89.426
  Top Layer w0.3: v2(93.748,83.572) 94.698,84.522 94.698,85.573 99.599,90.474 99.599,94.378 100.827,95.606 ; v2(93.798,36.36) 105.651,36.36 v2(105.751,36.46) ; v2(105.601,30.759) 106.251,30.109 108.951,30.109 109.327,30.484 U4.14@109.327,31.71 ; v2(105.801,6.753) 105.835,6.718 U1.5@108.652,6.718
  Bottom Layer w0.3: v2(93.748,83.572) 93.398,83.222 93.397,36.76 v2(93.798,36.36) ; v1@96.248,98.951 96.448,99.151 98.424,99.151 98.624,98.951 99.599,98.951 100.224,99.576 109.101,99.576 110.002,100.477 115.653,100.477 116.803,101.627 130.257,101.627 v1(130.557,101.927) ; v2(105.601,30.759) 105.651,30.709 v2@106.151,30.709 ; v2(105.751,36.46) 106.151,36.06 106.151,7.103 v2(105.801,6.753)
  other v1: 96.124,99.225
P0_16: U13.63
P0_17: U1.4 U4.17 U13.61 U23.2 U24.13 | length 177.1
  Top Layer w0.25: v2(93.598,27.958) 94.098,28.458 102.95,28.458 103.85,27.558 109.852,27.558 111.277,28.983 U4.17@111.277,31.71 ; U23.2@94.589,95.201 94.589,98.768 v1(94.698,98.876) ; v1(99.199,100.151) 99.224,97.626 99.824,97.026 100.114,97.026 U13.61@105.801,91.338 ; U24.13@135.339,98.676 135.339,102.458 v1(135.608,102.727)
  Top Layer w0.4: v2(92.597,86.973) 92.597,87.723 94.948,90.074 94.948,93.925 94.589,94.283 U23.2@94.589,95.201 ; v2(105,8.003) 105.016,7.988 U1.4@108.652,7.988
  Bottom Layer w0.3: 92.197,40.861 92.197,85.823 92.597,86.223 v2(92.597,86.973) ; 92.197,41.011 92.197,29.358 v2(93.598,27.958) ; v1(94.698,98.876) 94.698,99.449 95.674,100.425 96.674,100.425 96.949,100.151 108.751,100.151 109.777,101.177 115.303,101.177 116.403,102.277 128.956,102.277 129.857,103.177 135.158,103.177 v1(135.608,102.727) ; v1@99.175,100.125 99.175,100.127 v1(99.199,100.151) ; v2(105,8.003) v2(105,27.558)
P0_18: U1.3 U4.16 U13.60 U23.5 U24.14 | length 169.6
  Top Layer w0.25: v1(100.399,98.126) 100.399,97.448 U13.60@106.155,91.692
  Top Layer w0.3: v2(93.297,85.072) 98.999,90.774 98.999,95.725 97.129,97.595 U23.5@97.129,100.901 ; v2(94.898,29.408) 110.252,29.408 110.627,29.783 U4.16@110.627,31.71 ; v1@97.124,98.226 v1@97.129,98.231 ; v2(103.35,9.203) 103.405,9.258 U1.3@108.652,9.258 ; U24.14@134.058,98.676 v1(134.058,100.776) v1@134.058,100.976
  Bottom Layer w0.3: 92.797,84.572 v2(93.297,85.072) ; 92.797,84.572 92.797,30.159 93.548,29.408 v2(94.898,29.408) ; v1@97.124,98.226 97.224,98.126 v1(100.399,98.126) 102.25,98.126 102.5,98.376 109.301,98.376 110.702,99.776 115.953,99.776 117.153,100.976 129.757,100.976 130.307,100.426 133.708,100.426 v1(134.058,100.776) ; v2(103.3,29.458) 103.35,29.408 v2(103.35,9.203)
  other v1: 97.149,98.201
P0_19: U13.59
P0_19: 
P0_20: U13.58 U23.1 | length 18.1
  Top Layer w0.25: U23.1@93.319,95.201 93.319,96.997 v1(93.347,97.026) ; v1(102.3,97.126) 102.3,96.502 105.451,93.351 105.91,93.351 U13.58@106.862,92.399
  Bottom Layer w0.25: v1(93.347,97.026) 93.398,97.076 96.098,97.076 96.548,96.625 101.8,96.625 v1(102.3,97.126)
P0_21: U13.57
P0_23: U6.3 U13.9 | length 85
  Top Layer w0.25: U13.9@114.64,78.257 119.03,73.867 119.315,73.867 121.583,71.599 122.727,71.599 125.224,69.101 125.224,67.701 125.874,67.051 127.274,67.051 128.174,66.151 132.674,66.151 133.224,66.701 v1@134.274,66.701
  Top Layer w0.4: v1(135.574,21.901) 142.06,21.901 143.46,23.301 143.46,24.757 144.842,26.139 U6.3@145.804,26.139
  Bottom Layer w0.4: v1@134.024,66.951 v1(134.074,66.951) 134.074,66.401 134.974,65.501 134.974,58.782 134.558,58.366 134.558,57.215 134.974,56.799 134.974,53.63 134.528,53.184 134.528,51.844 134.974,51.398 134.974,45.651 135.424,45.201 135.424,22.051 v1(135.574,21.901)
P0_24: U10.3 U13.8 | length 55.7
  Top Layer w0.25: U13.8@114.287,77.903 118.212,73.978 ; 118.204,73.97 118.737,73.437 119.137,73.437 121.405,71.169 122.407,71.169 124.724,68.851 124.724,67.501 125.674,66.551 127.024,66.551 127.974,65.601 133.024,65.601 133.424,66.001 134.274,66.001 134.424,65.851 135.474,65.851 v1@135.974,66.351 ; v1(142.91,55.815) 142.929,55.796 U10.3@145.849,55.796
  Top Layer w0.3: v1(136.058,52.564) 136.458,52.164 142.324,52.164 v1(142.874,52.714)
  Bottom Layer w0.4: v1@135.974,66.351 136.074,66.251 136.074,59.05 136.808,58.316 136.808,57.315 136.074,56.581 v1@136.074,52.564 ; v1(142.874,52.714) 142.874,55.78 v1(142.91,55.815)
  other v1: 136.074,66.701
P0_25: 
P0_25: 
P0_25: 
P0_25: 
P0_25: 
P0_25: 
P0_25: 
P0_25: 
P0_25: 
P0_25: 
P0_25: C28.1 R40.1 R41.1 U13.7 | length 112.3
  Top Layer w0.25: U13.7@113.933,77.55 118.008,73.475 118.476,73.007 118.819,73.007 121.128,70.698 122.234,70.698 122.283,70.649 124.185,68.746 124.185,68.69 124.274,68.601 124.274,67.301 125.474,66.101 126.774,66.101 127.874,65.001 v1(133.924,65.001)
  Top Layer w0.4: v1(134.824,17.751) v1(148.124,17.751) ; v1(148.124,28.501) 153.72,28.501 154.975,27.246 155.163,27.058 v1(156.663,27.058) 158.549,27.058 R41.1@158.562,27.045
  Bottom Layer w0.3: 153.672,27.054 C28.1@154.772,27.054
  Bottom Layer w0.4: v1@133.924,64.951 134.274,64.601 134.274,58.903 133.978,58.606 133.978,56.975 134.274,56.679 134.274,53.751 133.948,53.424 133.948,51.424 134.274,51.097 134.274,45.201 134.724,44.751 134.724,22.651 134.574,22.501 134.574,20.801 134.824,20.551 v1(134.824,17.751) ; v1(148.124,17.751) v1(148.124,28.501) ; C28.1@154.772,27.054 156.66,27.054 v1(156.663,27.058)
P0_27: 
P0_27: 
P0_27: 
P0_27: 
P0_27: 
P0_27: 
P0_27: 
P0_27: 
P0_27: 
P0_27: 
P0_27: 
P0_27: 
P0_27: D11.2 R71.1 U13.25 | length 125.1
  Top Layer w0.25: U13.25@120.297,83.914 120.346,83.914 124.806,88.374 124.806,88.422 125.704,88.422 v1(126.605,89.322) ; v1(147.711,78.921) 149.112,80.321 153.163,80.321 ; v1(147.724,31.601) 153.971,31.601 154.763,30.809 154.763,30.259 154.82,30.201 154.877,30.145 R71.1@158.562,30.145 158.564,30.146 R71.1@158.564,30.159 ; 153.163,80.301 158.974,80.301 160.563,81.89 160.563,83.121 ; D11.2@154.324,30.051 D11.2@154.779,30.051 ; v1(159.924,86.551) 159.924,85.212 160.664,84.472 160.664,83.222 160.563,83.121 ; 160.563,83.171 160.563,83.121
  Bottom Layer w0.3: v1(126.605,89.322) 127.753,89.322 130.924,86.151 131.757,86.151 ; 131.774,86.151 131.757,86.151 ; v1(147.711,78.921) 149.024,77.608 149.024,65.701 149.574,65.151 149.574,51.127 147.311,48.863 147.311,32.015 v1(147.724,31.601) ; v1(159.924,86.551) 152.634,86.551 151.312,87.873 133.479,87.873 131.757,86.151
P0_28: R10.1 U6.11 U10.11 U13.24 | length 77.5
  Top Layer w0.25: v1(135.724,57.766) 136.758,57.766 137.859,58.866 138.709,58.866 139.459,59.616 U10.11@139.959,59.616 ; R10.1@135.784,34.709 135.758,33.51 v1(136.558,32.709) 139.319,29.949 U6.11@139.954,29.949
  Top Layer w0.3: U13.24@119.944,83.56 120.553,82.951 122.924,82.951 v1(123.524,83.551) ; v1(125.824,79.151) 128.924,76.051 ; 128.906,76.07 134.506,76.07 ; 134.524,76.051 v1(134.924,76.451)
  Bottom Layer w0.3: v1(123.524,83.551) 124.324,83.551 124.724,83.151 124.724,80.851 125.824,79.751 v1(125.824,79.151) ; v1(134.924,76.451) 134.274,75.801 134.274,70.151 135.024,69.401 135.024,66.201 135.524,65.701 135.524,53.431 135.058,52.964 135.058,52.214 135.524,51.748 135.524,46.451 136.174,45.801 v1@136.174,32.709
P0_29: R72.1 U13.29 | length 71.2
  Top Layer w0.25: U13.29@119.237,87.449 121.438,89.651 124.074,89.651 v1(124.374,89.951)
  Top Layer w0.4: v1(169.324,87.651) 169.324,100.101 170.617,101.394 170.617,103.728 R72.1@170.617,103.751
  Bottom Layer w0.3: v1(124.374,89.951) 124.633,89.951 126.805,92.123 127.855,92.123 128.155,91.823 128.155,90.621 128.992,89.784 129.524,89.251 141.074,89.251 141.774,88.551 151.574,88.551 152.474,87.651 v1(169.324,87.651)
P0_30: JP6.12 U13.30 | length 43.6
  Top Layer w0.3: U13.30@118.883,87.803 121.281,90.201 123.232,90.201 123.904,90.873 125.554,90.873 127.255,92.573 127.255,98.075 126.874,98.455 126.874,101.301 129.224,103.651 133.474,103.651 135.524,105.701 135.524,107.251 135.174,107.601 125.114,107.601 JP6.12@123.874,108.841
P1_0: U3.3 U13.95 | length 76.5
  Top Layer w0.25: v1(95.425,48.999) 96.313,49.887 108.733,49.887 109.651,48.969 110.857,48.969 111.775,49.887 119.302,49.887 119.852,49.337 120.602,49.337 v1(121.602,50.337) ; v1@101.199,71.769 101.682,72.251 102.624,72.251 U13.95@107.569,77.196
  Bottom Layer w0.3: 95.425,48.436 95.948,47.913 97.198,47.913 97.799,48.513 97.799,49.464 97.449,49.814 97.449,50.614 95.748,52.314 95.748,61.567 97.749,63.567 97.749,64.417 101.199,67.868 101.199,71.719 v1(101.149,71.769) ; U3.3@114.403,55.509 119.252,50.66 119.252,49.887 119.752,49.387 120.802,49.387 121.602,50.187 v1(121.602,50.337)
P1_1: U3.4 U13.94 | length 78.8
  Top Layer w0.25: v1(96.825,48.949) 97.313,49.437 108.575,49.437 109.472,48.539 111.035,48.539 111.933,49.437 119.102,49.437 119.702,48.837 121.502,48.837 v1(122.952,50.287) ; v1(99.199,73.069) 99.517,72.751 102.452,72.751 U13.94@107.216,77.514
  Bottom Layer w0.3: v1@97.025,49.149 v1(96.825,48.949) 96.825,50.437 95.148,52.114 95.148,61.867 97.148,63.867 97.148,64.667 100.649,68.168 100.649,70.819 99.199,72.269 v1(99.199,73.069) ; U3.4@114.05,55.155 118.702,50.503 118.702,49.637 119.502,48.837 121.802,48.837 122.952,49.987 v1(122.952,50.287)
P1_4: U3.2 U13.93 | length 71.4
  Top Layer w0.25: v1@95.425,50.349 108.378,50.343 ; v1(99.049,74.47) 100.268,73.251 102.21,73.251 U13.93@106.862,77.903 ; 108.378,50.349 108.878,50.349 109.829,49.399 110.679,49.399 111.629,50.349 112.029,50.349 ; 112.029,50.341 v1(120.252,50.337)
  Bottom Layer w0.3: v1(95.425,50.449) 94.598,51.276 94.598,62.167 96.598,64.167 96.598,64.867 100.049,68.318 100.049,70.569 98.249,72.369 98.249,73.67 v1(99.049,74.47) ; U3.2@114.757,55.863 120.252,50.367 v1(120.252,50.337)
P1_8: U3.40 U13.92 | length 36.8
  Top Layer w0.25: v1(101.374,74.151) 102.403,74.151 U13.92@106.509,78.257 ; v1(102.45,64.967) 102.8,64.617 104.15,64.617 105.15,65.618 106.07,65.618 106.251,65.437 v1@114.653,65.437
  Bottom Layer w0.25: v1(101.374,74.151) 103.018,74.151 103.5,73.67 103.5,72.519 103.85,72.169 103.85,67.468 102.45,66.068 v1(102.45,64.967) ; U3.40@112.282,61.06 114.653,63.431 v1@114.653,65.437
  other v1: 114.853,65.217
P1_9: U3.43 U13.91 | length 39.7
  Top Layer w0.25: v1(102.174,75.201) 102.746,75.201 U13.91@106.155,78.61 ; v1@104.95,71.919 105.868,71.001 117.871,71.001 120.454,68.418 v2(121.155,68.418)
  Bottom Layer w0.25: v1(102.174,75.201) 103.219,75.201 104.05,74.37 104.05,72.819 v1@104.95,71.919 ; U3.43@113.343,59.999 113.422,60.079 121.155,67.811 v2(121.155,68.418)
  other v1: 104.95,71.969
P1_10: U3.44 U13.90 | length 43.4
  Top Layer w0.25: v1(101.374,76.251) 101.474,76.351 103.189,76.351 U13.90@105.801,78.964 ; v1@105,73.32 106.819,71.501 118.174,71.501 120.307,69.369 121.655,69.369 122.174,68.849 v1(122.174,67.301)
  Bottom Layer w0.25: U3.44@113.817,59.767 121.352,67.301 v1(122.174,67.301)
  Bottom Layer w0.3: v1(101.374,76.251) 103.469,76.251 105,74.72 v1@105,73.32 ; U3.44@113.696,59.646 U3.44@113.817,59.767
  other v1: 104.95,73.27
P1_14: U3.41 U13.89 | length 35.1
  Top Layer w0.25: v1(102.174,77.351) 103.482,77.351 U13.89@105.448,79.318 ; v1(105.551,64.567) 105.851,64.867 113.853,64.867 114.453,64.267 115.653,64.267 v1@115.903,64.517
  Bottom Layer w0.25: U3.41@112.635,60.706 115.903,63.974 v1@115.903,64.517
  Bottom Layer w0.3: v1(102.174,77.351) 103.169,77.351 105.874,74.646 105.874,64.891 v1(105.551,64.567)
  other v1: 116.003,64.517
P1_15: U3.34 U12.3 U13.88 | length 67.1
  Top Layer w0.25: U12.3@94.474,40.261 94.498,40.237 v1(94.498,38.261) ; v1(95.598,64.567) 96.148,65.117 101.049,65.117 102.08,64.087 104.48,64.087 105.25,63.317 107.001,63.317 v1(107.451,63.767) ; v1(98.099,75.42) 98.793,75.42 101.624,78.251 103.674,78.251 U13.88@105.094,79.671
  Bottom Layer w0.25: v1(94.498,38.261) 93.998,38.761 93.998,62.967 v1(95.598,64.567) 99.499,68.468 99.499,70.369 97.699,72.169 97.699,75.02 v1(98.099,75.42) ; v1(107.451,63.767) 107.451,62.461 U3.34@108.499,61.413
P1_16: U3.31 U13.87 | length 24.2
  Top Layer w0.25: v1(102.174,79.151) 102.424,78.901 103.617,78.901 U13.87@104.741,80.025
  Bottom Layer w0.3: v1(102.174,79.151) 106.474,74.851 106.474,61.293 U3.31@107.501,60.266
P1_17: U3.30 U13.86 | length 29
  Top Layer w0.25: v1(100.724,78.851) 100.724,79.201 101.774,80.251 102.624,80.251 103.324,79.551 103.56,79.551 U13.86@104.387,80.378 ; v1(102.95,70.119) v1(104.75,70.119)
  Bottom Layer w0.25: v1@104.95,69.919 105.25,69.619 105.25,65.718 104.6,65.067 104.6,64.217 105.901,62.917 105.901,61.183 U3.30@107.085,59.999
  Bottom Layer w0.3: v1(100.724,78.851) 100.424,78.551 100.424,73.644 101.099,72.969 102.05,72.969 103.35,71.669 103.35,70.519 v1(102.95,70.119)
P1_18: JP6.5 U13.32 | length 21.8
  Top Layer w0.3: JP6.5@116.254,106.301 116.254,104.171 122.024,98.401 122.024,92.359 U13.32@118.176,88.51
P1_19: JP6.7 U13.33 | length 27
  Top Layer w0.3: U13.33@117.822,88.863 121.374,92.416 121.374,98.101 115.024,104.451 115.024,107.301 115.374,107.651 117.444,107.651 JP6.7@118.794,106.301
P1_20: JP6.9 U13.34 | length 25.5
  Top Layer w0.3: U13.34@117.469,89.217 120.724,92.473 120.724,97.751 118.474,100.001 v1@117.924,100.001 ; JP6.9@121.334,106.301 121.334,100.741 122.349,99.726 v1@122.374,99.701
  Bottom Layer w0.3: v1@117.924,100.001 118.224,100.301 121.774,100.301 122.349,99.726 v1@122.374,99.701
  other v1: 117.724,100.001 122.624,100.001
P1_21: 
P1_21: JP6.11 U13.35 | length 25.7
  Top Layer w0.25: v1@118.324,98.751 118.874,98.751 119.174,98.451
  Top Layer w0.3: U13.35@117.115,89.571 120.124,92.58 120.124,97.501 119.174,98.451 ; v1@123.574,98.851 123.574,98.951 123.574,100.351 121.974,101.951 121.974,104.401 JP6.11@123.874,106.301
  Bottom Layer w0.3: v1@118.324,98.751 118.349,98.776 118.574,99.001 123.424,99.001 123.499,98.926 v1@123.524,98.901
  other v1: 118.324,98.801 123.524,98.951
P1_22: JP6.13 U13.36 | length 27.2
  Top Layer w0.25: v1@118.024,96.601 118.924,96.601 119.474,96.051 119.474,92.637 ; v1(123.524,96.551) 124.024,96.551 124.474,97.001 124.474,97.951
  Top Layer w0.3: U13.36@116.762,89.924 119.474,92.637 ; 124.474,97.951 124.474,100.351 122.974,101.851 122.974,103.201 126.074,106.301 JP6.13@126.414,106.301
  Bottom Layer w0.3: v1@118.024,96.551 v1(123.524,96.551) v1@123.574,96.601
  other v1: 117.752,96.424
P1_22: 
P1_22: 
P1_22: 
P1_22: 
P1_22: 
P1_22: 
P1_22: 
P1_23: JP6.15 U13.37 | length 25.4
  Top Layer w0.25: v1@123.774,95.251 123.799,95.276 125.074,96.551 125.074,96.651
  Top Layer w0.3: U13.37@116.408,90.278 118.874,92.744 118.874,95.251 118.652,95.474 v1@118.524,95.601 ; 125.074,96.651 125.074,102.421 JP6.15@128.954,106.301
  Bottom Layer w0.3: v1@118.524,95.601 v1@118.574,95.551 ; v1@118.574,95.401 118.577,95.399 119.224,94.751 123.274,94.751 v1@123.774,95.251
  other v1: 123.874,95.201 118.603,95.424
P1_24: JP6.17 U13.38 | length 27
  Top Layer w0.25: v1(124.974,94.351) 125.674,95.051 125.674,95.851
  Top Layer w0.3: U13.38@116.055,90.631 117.924,92.501 v1@117.924,94.151 ; 125.674,95.851 125.674,102.051 128.424,104.801 129.994,104.801 JP6.17@131.494,106.301
  Bottom Layer w0.25: 122.974,94.151 124.774,94.151 v1(124.974,94.351)
  Bottom Layer w0.3: v1@117.924,94.151 122.974,94.151
  other v1: 117.752,94.374
P1_25: 
P1_25: 
P1_25: 
P1_25: 
P1_25: 